# Altium PCB PCB.PcbDoc
Units mm, origin at the board's own origin, x right, y up, seen from the top; angles counter-clockwise.
Board outline 65 x 56 mm, 2 copper layers (Top Layer, Bottom Layer); 77 components, 98 nets, 362 pads, 32 vias.
Unrouted connection lines stored in the file: 125.
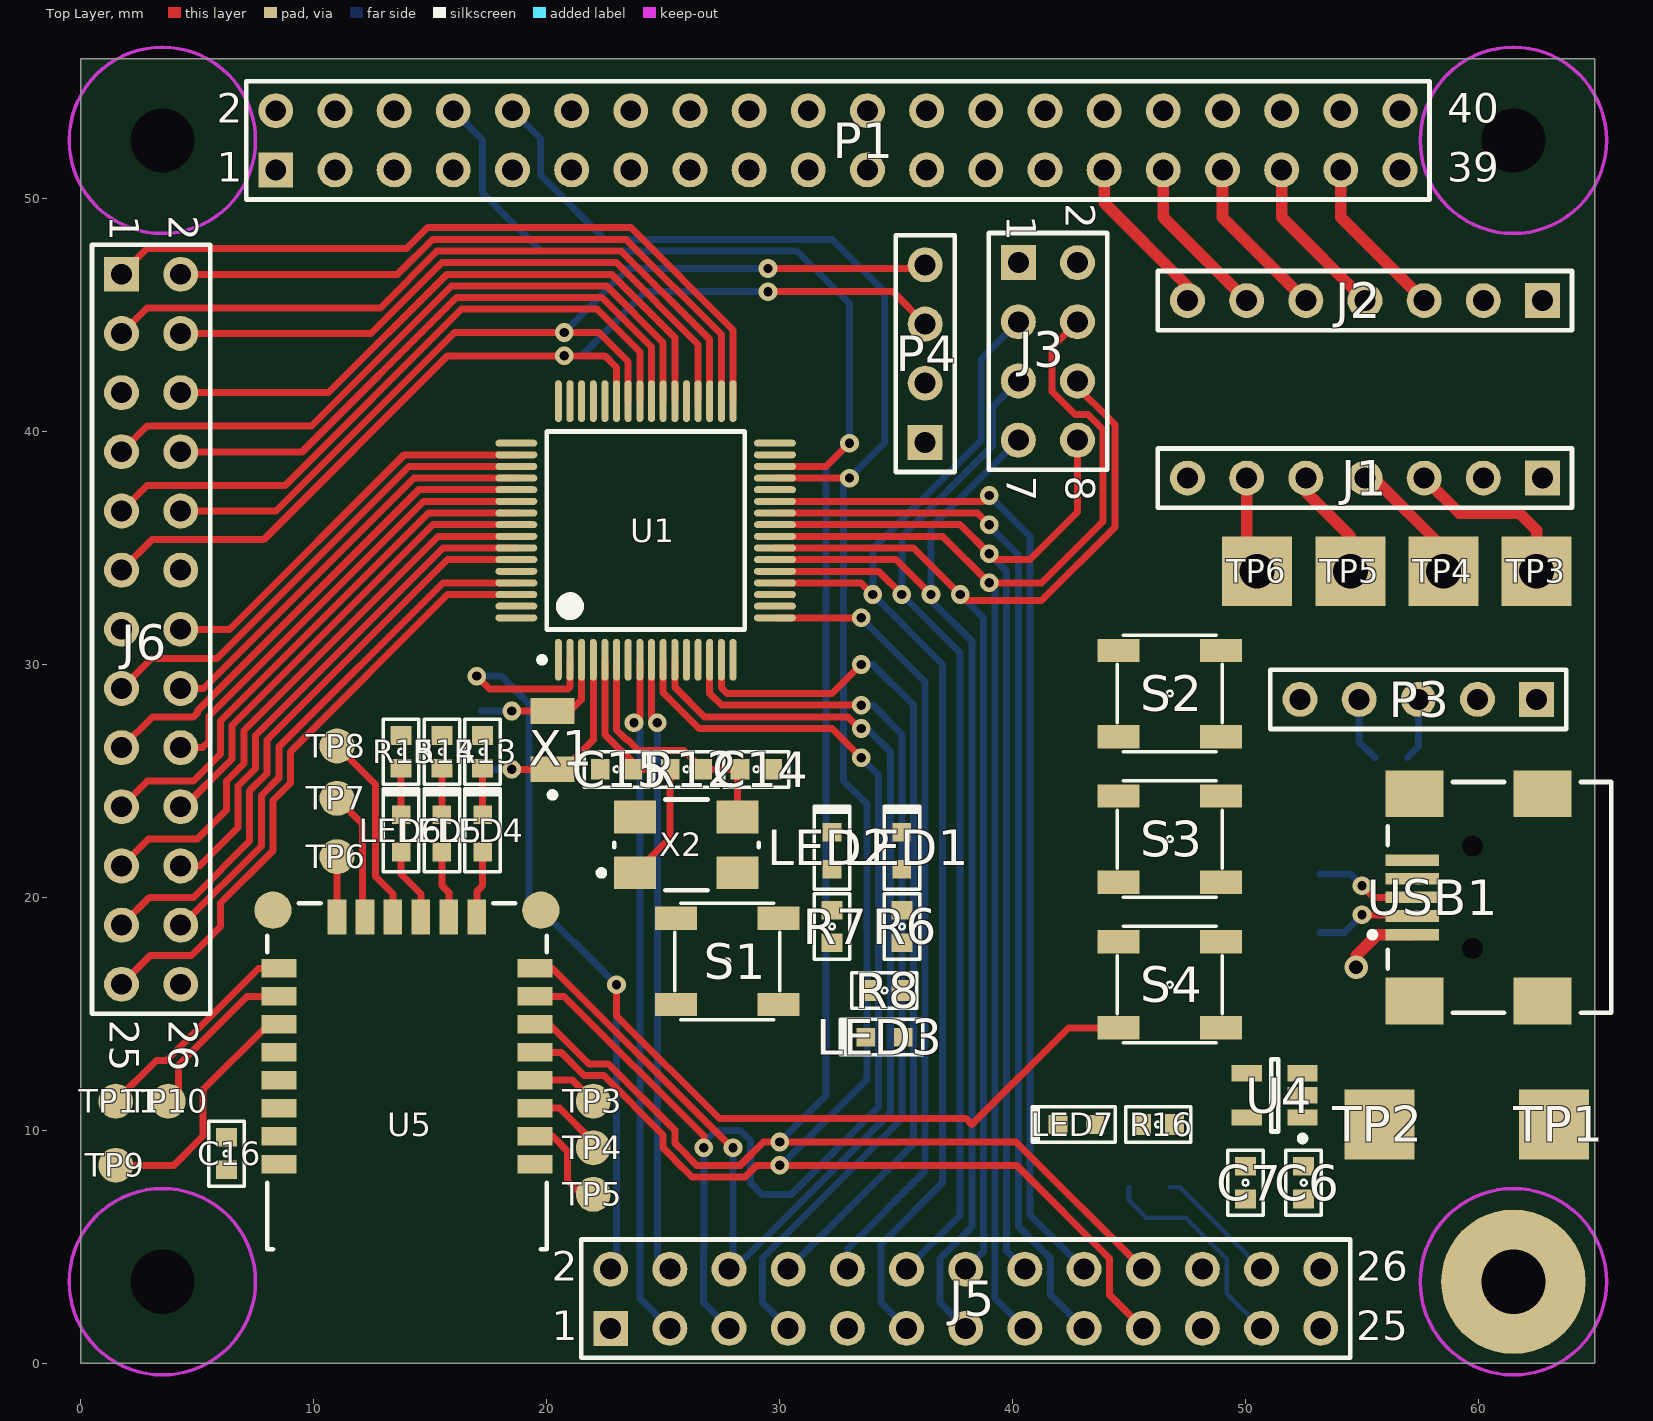
[diagram p0: Top Layer view]
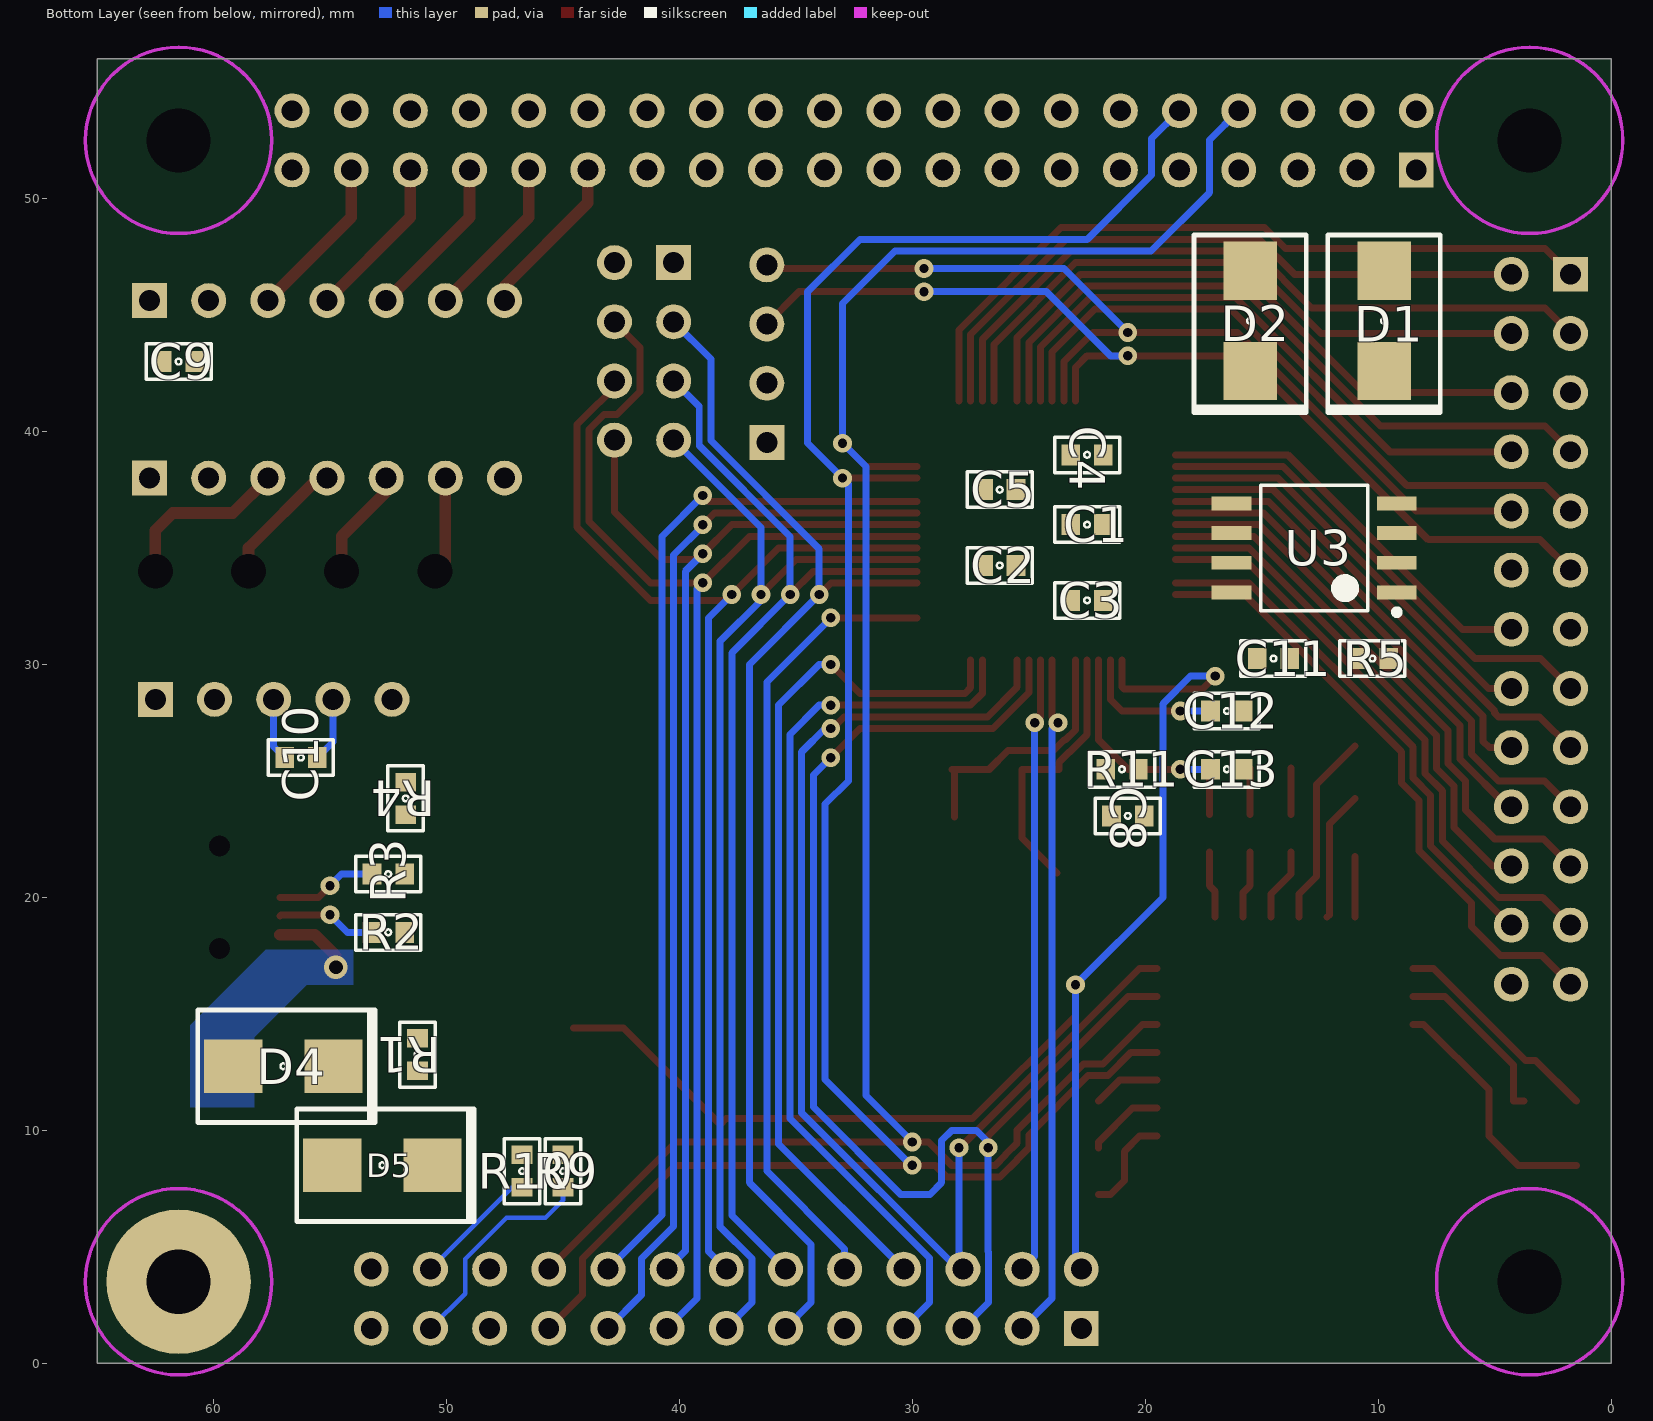
[diagram p1: Bottom Layer view, seen from below]

## Layer stack, top to bottom
Top Solder: solder mask 0.0102, Solder Resist, Dk 3.5
Top Layer: signal copper 0.0356
Dielectric1: dielectric 0.32, FR-4, Dk 4.8
Bottom Layer: signal copper 0.0356
Bottom Solder: solder mask 0.0102, Solder Resist, Dk 3.5

## Board outline
0,0 65,0 65,56 0,56

## Design rules (kind name [scope] priority, off if disabled: settings)
AssemblyTestPointUsage AssemblyTestPointUsage_1 [All] p2:
AssemblyTestpoint AssemblyTestpoint_1 [All] p2: testpointundercomponent=TRUE minsize=1.016 maxsize=2.54 preferedsize=1.524 minholesize=0 maxholesize=1.016 preferedholesize=0.813 testpointgrid=0.025 usegrid=TRUE gridtolerance=0 allowsidetop=TRUE allowsidebottom=TRUE
Clearance [All] p1: gap=0.2
FabricationTestPointUsage TestPointUsage [All] p2: valid=0 allowmultiple=FALSE
FabricationTestpoint Testpoint [All] p2: side=3 testpointundercomponent=TRUE minsize=1.016 maxsize=2.54 preferedsize=1.524 minholesize=0 maxholesize=1.016 preferedholesize=0.813 testpointgrid=0.025 allowsidetop=TRUE allowsidebottom=TRUE usegrid=TRUE gridtolerance=0
FanoutControl Fanout_LCC [IsLCC] p1: bgadir=Out bgaviamode=Centered fanoutstyle=Auto fanoutdirection=Alternating viagrid=0.025 // Fanout_LCC (Default Rule)
FanoutControl Fanout_BGA [IsBGA] p2: bgadir=Out bgaviamode=Centered fanoutstyle=Auto fanoutdirection=Alternating viagrid=0.025 // Fanout_BGA (Default Rule)
FanoutControl Fanout_Default [All] p4: bgadir=Out bgaviamode=Centered fanoutstyle=Auto fanoutdirection=Alternating viagrid=0.025 // Fanout_Default (Default Rule)
FanoutControl Fanout_Small [(CompPinCount < 5)] p5: bgadir=Out bgaviamode=Centered fanoutstyle=Auto fanoutdirection=OutThenIn viagrid=0.025 // Fanout_Small (Default Rule)
Height Height_1 [All] p2: minheight=0 maxheight=25.4 prefheight=12.7
HoleSize [All] p1: absolutevalues=TRUE maxlimit=0.6 minlimit=0.025 maxpercent=80.000 minpercent=20.000
MinimumSolderMaskSliver MinimumSolderMaskSliver_1 [All] p2 off: minsoldermaskwidth=0.254
NetAntennae NetAntennae_1 [All] p2 off: netantennaetolerance=0
PasteMaskExpansion [All] p1: expansion=-0.05
PlaneConnect [All] p1: planeconnectstyle=Direct reliefexpansion=0.508 reliefentries=4 reliefconductorwidth=0.254 reliefairgap=0.254
PolygonConnect [All] p1: connectstyle=Direct reliefconductorwidth=0.254 reliefentries=4 polygonreliefangle="90 Angle" airgapwidth=0.254
RoutingTopology [All] p1: topology=Horizontal
RoutingVias [All] p1: holewidth=0.6 width=1 viastyle="Through Hole" minholewidth=0.4 minwidth=0.8 maxholewidth=0.711 maxwidth=1.27
SilkToBoardRegionClearance SilkToBoardRegionClearance_1 [All] p2:
SilkToSilkClearance SilkToSilkClearance_1 [All] p2 off: silktosilkclearance=0.254
SilkToSolderMaskClearance SilkscreenOverComponentPads [IsPad] p2 off: minsilkscreentomaskgap=0.254 clearancetoexposedcopper=TRUE
SolderMaskExpansion [All] p1: expansion=0.1
Width [All] p1: maxlimit=1 minlimit=0.3 preferedwidth=0.5 minimp=50.000000 maximp=50.000000 favimp=50.000000
22 further rules are at their usual default settings.

## Components (designator, comment, footprint, x,y, rotation, side; value= is the part's Value field where it differs from the comment)
C1 "0.1uF" 1608[0603] 22.5,36 r180 bottom
C2 "0.1uF" 1608[0603] 26.25,34.25 r0 bottom
C3 "0.1uF" 1608[0603] 22.5,32.75 r180 bottom
C4 "0.1uF" 1608[0603] 22.5,39 r180 bottom
C5 "0.1uF" 1608[0603] 26.25,37.5 r0 bottom
C6 "1uF" 1608[0603] 52.5,7.75 r90 top
C7 "1uF" 1608[0603] 50,7.75 r90 top
C8 "0.1uF" 1608[0603] 20.75,23.5 r0 bottom
C9 "0.1uF" 1608[0603] 61.5,43 r0 bottom
C10 "1000pF" 1608[0603] 56.25,26 r0 bottom
C11 "0.1uF" 1608[0603] 14.5,30.25 r180 bottom
C12 "15pF" 1608[0603] 16.5,28 r180 bottom
C13 "15pF" 1608[0603] 16.5,25.5 r180 bottom
C14 "22pF" 1608[0603] 29,25.5 r0 top
C15 "22pF" 1608[0603] 23,25.5 r180 top
C16 "4.7uF" 1608[0603] 6.25,9 r270 top
D1 "B340LB-13-F" DIOM4336X25N 9.75,44.75 r270 bottom
D2 "B340LB-13-F" DIOM4336X25N 15.5,44.75 r270 bottom
D4 "B340LB-13-F" DIOM4336X25N 57,12.75 r180 bottom
D5 "B340LB-13-F" DIOM4336X25N 52.75,8.5 r180 bottom
J1 "Header 7" HDR1X7 62.75,38 r180 top
J2 "Header 7" HDR1X7 62.75,45.62 r180 top
J3 "NRF2401" HDR2X4 40.25,47.25 r270 top
J5 "HDR2X13" HDR2X13 22.75,1.5 r0 top
J6 "HDR2X13" HDR2X13 1.75,46.75 r270 top
LED1 "LED2" 0603_A 35.25,22 r270 top
LED2 "LED2" 0603_A 32.25,22 r270 top
LED3 "LED2" 0603_A 34.5,14 r0 top
LED4 "GREEN" 0603_A 17.25,22.75 r270 top
LED5 "RED" 0603_A 15.5,22.75 r270 top
LED6 "BLUE" 0603_A 13.75,22.75 r270 top
LED7 "GREEN" 0603_A 42.75,10.25 r0 top
P1 "RaspberryPi Header 20X2" HDR2X20 32.5,52.5 r0 top
P3 "Header 5" HDR1X5 62.5,28.5 r180 top
P4 "ISP DOWNLOAD PORT" HDR1X4 36.25,39.533 r90 top
R1 "0" 1608[0603] 51.25,13.25 r270 bottom
R2 "22" 1608[0603] 52.5,18.5 r0 bottom
R3 "22" 1608[0603] 52.5,21 r0 bottom
R4 "1.5k" 1608[0603] 51.75,24.25 r270 bottom
R5 "10k" 1608[0603] 10.25,30.25 r0 bottom
R6 "510" 1608[0603] 35.25,18.75 r270 top
R7 "510" 1608[0603] 32.25,18.75 r270 top
R8 "510" 1608[0603] 34.5,16 r0 top
R9 "10K" 1608[0603] 45,8.25 r270 bottom
R10 "10K" 1608[0603] 46.75,8.25 r270 bottom
R11 "10K" 1608[0603] 21,25.5 r0 bottom
R12 "1M" 1608[0603] 26,25.5 r0 top
R13 "330" 1608[0603] 17.25,26.25 r90 top
R14 "330" 1608[0603] 15.5,26.25 r90 top
R15 "330" 1608[0603] 13.75,26.25 r90 top
R16 "510" 1608[0603] 46.25,10.25 r0 top
S1 "TSKB-2JL" TSKB-2JL 27.75,17.25 r0 top
S2 "TSKB-2JL" TSKB-2JL 46.75,28.75 r0 top
S3 "TSKB-2JL" TSKB-2JL 46.75,22.5 r0 top
S4 "TSKB-2JL" TSKB-2JL 46.75,16.25 r0 top
TP1 "5V_BATT" PAD1#1 63.25,10.25 r90 top
TP2 "GND_BATT" PAD1#1 55.75,10.25 r90 top
TP3 "" PAD1#2 62.5,34 r0 top
TP3 "" PAD1#3 22,11.25 r0 top
TP4 "" PAD1#2 58.5,34 r0 top
TP4 "" PAD1#3 22,9.25 r0 top
TP5 "" PAD1#2 54.5,34 r0 top
TP5 "" PAD1#3 22,7.25 r0 top
TP6 "" PAD1#3 11,21.75 r0 top
TP6 "" PAD1#2 50.5,34 r0 top
TP7 "" PAD1#3 11,24.25 r0 top
TP8 "" PAD1#3 11,26.5 r0 top
TP9 "" PAD1#3 1.5,8.5 r0 top
TP10 "" PAD1#3 3.75,11.25 r90 top
TP11 "" PAD1#3 1.5,11.25 r90 top
U1 "STM32F103RCT6TR" STM-LQFP64_N 24.25,35.75 r90 top
U3 "W25X16" SOIC-SSCODE_SOIC127P790X216-8N 12.75,35 r0 bottom
U4 "MCP1801T-3302I/OT" SOT-23-OT5_M 51.25,11.5 r180 top
U5 "RN4020 MODULE-24" "RN4020 MODULE-24" 14,14 r180 top
USB1 "USB002" USB/SM0.8-6H5 65,20 r0 top
X1 "ABS07-32.768KHz-T" ABRA-ABS07-2_V 20.25,26.75 r90 top
X2 "ABMM2-8.000MHZ-E2-T" ABRA-ABMM2-4_V 26,22.25 r0 top

## Footprints (in the part's own frame and the unit in brackets; to place one, negate y for a bottom-side part, rotate by r counter-clockwise, add the part's x,y. Pads: shape width x height; smd on the part's side, far side on the other; paste and mask are expansions set on the pad)
0603_A [mm] "Chip LED, 1608"
  rect 0.8x0.8 smd: 1(-0.8,0) 2(0.8,0)
  silkscreen extent -1.91,-0.76 1.65,0.76, body extent -0.8,-0.4 0.8,0.4, height 0.7
1608[0603] [mm] "Chip Capacitor, Body 1.6x0.8mm, IPC High Density"
  rect 0.8x0.9 smd: 1(-0.7,0) 2(0.7,0)
  silkscreen extent -1.4,-0.76 1.4,0.76, body extent -0.87,-0.48 0.87,0.48, height 1.3
ABRA-ABMM2-4_V [mm] "SMD, 4-Leads, Body 6.2x3.9mm, Pitch 4.4mm, Height 1.2mm"
  rect 1.8x1.4 smd: 1(-2.2,-1.2) 2(2.2,-1.2) 3(2.2,1.2) 4(-2.2,1.2)
  silkscreen extent -3.77,-1.95 3.1,1.95, body extent -3.1,-1.95 3.1,1.95, height 1.2
ABRA-ABS07-2_V [mm] "Hand Drawn, 2-Leads, Body 3.2x1.5mm, Pitch 2.5mm"
  rect 1.1x1.9 smd: 1(-1.25,0) 2(1.25,0)
  silkscreen extent -2.47,-0.13 -2.23,0.12, body extent -1.6,-0.75 1.6,0.75, height 0.9
DIOM4336X25N [mm] "Molded Diode, 2-Leads, Body 4.31x3.62mm, IPC Medium Density"
  rect 2.5x2.3 smd: 1(-2.15,0) 2(2.15,0)
  silkscreen extent -3.68,-2.41 3.94,2.41, body extent -2.5,-1.97 2.51,1.97, height 2.5
HDR1X4 [mm] "Connector; Header; 4 Position"
  rect 1.5x1.5 hole 0.9: 1(0,0)
  round 1.5 hole 0.9: 2(2.54,0) 3(5.08,0) 4(7.62,0)
  silkscreen extent -1.27,-1.27 8.89,1.27
HDR1X5 [mm] "Connector; Header; 5 Position"
  rect 1.5x1.5 hole 0.9: 1(0,0)
  round 1.5 hole 0.9: 2(2.54,0) 3(5.08,0) 4(7.62,0) 5(10.16,0)
  silkscreen extent -1.27,-1.27 11.43,1.27
HDR1X7 [mm] "Connector; Header; 7 Position"
  rect 1.5x1.5 hole 0.9: 1(0,0)
  round 1.5 hole 0.9: 2(2.54,0) 3(5.08,0) 4(7.62,0) 5(10.16,0) 6(12.7,0) 7(15.24,0)
  silkscreen extent -1.27,-1.27 16.51,1.27
HDR2X4 [mm] "Connector; Header; 4x2 Position"
  rect 1.5x1.5 hole 0.9: 1(0,0)
  round 1.5 hole 0.9: 2(0,2.54) 3(2.54,0) 4(2.54,2.54) 5(5.08,0) 6(5.08,2.54) 7(7.62,0) 8(7.62,2.54)
  silkscreen extent -1.27,-1.27 8.89,3.81
HDR2X13 [mm] "Connector; Header; 13x2 Position"
  rect 1.5x1.5 hole 0.9: 1(0,0)
  round 1.5 hole 0.9: 2(0,2.54) 3(2.54,0) 4(2.54,2.54) 5(5.08,0) 6(5.08,2.54) 7(7.62,0) 8(7.62,2.54) 9(10.16,0) 10(10.16,2.54) 11(12.7,0) 12(12.7,2.54) 13(15.24,0) 14(15.24,2.54) 15(17.78,0) 16(17.78,2.54) 17(20.32,0) 18(20.32,2.54) 19(22.86,0) 20(22.86,2.54) 21(25.4,0) 22(25.4,2.54) 23(27.94,0) 24(27.94,2.54) 25(30.48,0) 26(30.48,2.54)
  silkscreen extent -1.27,-1.27 31.75,3.81
HDR2X20 [mm] "Connector; Header; 20x2 Position"
  rect 1.5x1.5 hole 0.9: 1(-24.13,-1.27)
  round 1.5 hole 0.9: 2(-24.13,1.27) 3(-21.59,-1.27) 4(-21.59,1.27) 5(-19.05,-1.27) 6(-19.05,1.27) 7(-16.51,-1.27) 8(-16.51,1.27) 9(-13.97,-1.27) 10(-13.97,1.27) 11(-11.43,-1.27) 12(-11.43,1.27) 13(-8.89,-1.27) 14(-8.89,1.27) 15(-6.35,-1.27) 16(-6.35,1.27) 17(-3.81,-1.27) 18(-3.81,1.27) 19(-1.27,-1.27) 20(-1.27,1.27) 21(1.27,-1.27) 22(1.27,1.27) 23(3.81,-1.27) 24(3.81,1.27) 25(6.35,-1.27) 26(6.35,1.27) 27(8.89,-1.27) 28(8.89,1.27) 29(11.43,-1.27) 30(11.43,1.27) 31(13.97,-1.27) 32(13.97,1.27) 33(16.51,-1.27) 34(16.51,1.27) 35(19.05,-1.27) 36(19.05,1.27) 37(21.59,-1.27) 38(21.59,1.27) 39(24.13,-1.27) 40(24.13,1.27)
  silkscreen extent -25.4,-2.54 25.4,2.54
PAD1#1 [mm]
  rect 3x3 smd: 1(0,0)
PAD1#2 [mm]
  rect 3x3 / inner rect 3x3 / far side rect 0x0 hole 1.5: 1(0,0)
PAD1#3 [mm]
  round 1.5 smd: 1(0,0)
"RN4020 MODULE-24" [mm]
  rect 1.5x0.8 smd: 1(-5.5,5.45) 2(-5.5,4.25) 3(-5.5,3.05) 4(-5.5,1.85) 5(-5.5,0.65) 6(-5.5,-0.55) 7(-5.5,-1.75) 8(-5.5,-2.95) 17(5.5,-2.95) 18(5.5,-1.75) 19(5.5,-0.55) 20(5.5,0.65) 21(5.5,1.85) 22(5.5,3.05) 23(5.5,4.25) 24(5.5,5.45)
  round 1.6 smd: 9(-5.75,-5.45) 16(5.75,-5.45)
  rect 0.8x1.5 smd: 10(-3,-5.15) 11(-1.8,-5.15) 12(-0.6,-5.15) 13(0.6,-5.15) 14(1.8,-5.15) 15(3,-5.15)
  silkscreen extent -6,-5.75 6,9.1, body extent -5.75,-5.45 5.75,14.05, height 2.3
SOIC-SSCODE_SOIC127P790X216-8N [mm] "SOIC, 8-Leads, Body 5.28x5.28mm, Pitch 1.27mm, IPC Medium Density"
  rect 1.7x0.6 smd: 1(-3.55,1.905) 2(-3.55,0.635) 3(-3.55,-0.635) 4(-3.55,-1.905) 5(3.55,-1.905) 6(3.55,-0.635) 7(3.55,0.635) 8(3.55,1.905)
  silkscreen extent -3.67,-2.7 2.3,2.88, body extent -3.95,-2.7 3.95,2.7, height 2.16
SOT-23-OT5_M [mm] "SOT23, 5-Leads, Body 2.9x1.7mm, Pitch 0.95mm, Lead Span 2.8mm, IPC Low Density"
  rect 1.3x0.7 smd: 1(-1.2,0.95) 2(-1.2,0) 3(-1.2,-0.95) 4(1.2,-0.95) 5(1.2,0.95)
  silkscreen extent -1.33,-1.55 0.15,1.97, body extent -0.9,-1.55 0.9,1.55, height 1.45
STM-LQFP64_N [mm] "Thin QFP, 64-Leads, Body 10x10mm, Pitch 0.5mm, IPC Medium Density"
  oval 1.8x0.3 smd: 1(-5.55,3.75) 2(-5.55,3.25) 3(-5.55,2.75) 4(-5.55,2.25) 5(-5.55,1.75) 6(-5.55,1.25) 7(-5.55,0.75) 8(-5.55,0.25) 9(-5.55,-0.25) 10(-5.55,-0.75) 11(-5.55,-1.25) 12(-5.55,-1.75) 13(-5.55,-2.25) 14(-5.55,-2.75) 15(-5.55,-3.25) 16(-5.55,-3.75) 33(5.55,-3.75) 34(5.55,-3.25) 35(5.55,-2.75) 36(5.55,-2.25) 37(5.55,-1.75) 38(5.55,-1.25) 39(5.55,-0.75) 40(5.55,-0.25) 41(5.55,0.25) 42(5.55,0.75) 43(5.55,1.25) 44(5.55,1.75) 45(5.55,2.25) 46(5.55,2.75) 47(5.55,3.25) 48(5.55,3.75)
  oval 0.3x1.8 smd: 17(-3.75,-5.55) 18(-3.25,-5.55) 19(-2.75,-5.55) 20(-2.25,-5.55) 21(-1.75,-5.55) 22(-1.25,-5.55) 23(-0.75,-5.55) 24(-0.25,-5.55) 25(0.25,-5.55) 26(0.75,-5.55) 27(1.25,-5.55) 28(1.75,-5.55) 29(2.25,-5.55) 30(2.75,-5.55) 31(3.25,-5.55) 32(3.75,-5.55) 49(3.75,5.55) 50(3.25,5.55) 51(2.75,5.55) 52(2.25,5.55) 53(1.75,5.55) 54(1.25,5.55) 55(0.75,5.55) 56(0.25,5.55) 57(-0.25,5.55) 58(-0.75,5.55) 59(-1.25,5.55) 60(-1.75,5.55) 61(-2.25,5.55) 62(-2.75,5.55) 63(-3.25,5.55) 64(-3.75,5.55)
  silkscreen extent -5.67,-4.25 4.25,4.57, body extent -5,-5 5,5, height 1.6
TSKB-2JL [mm] "tact switch"
  rect 1.8x1 smd: 1(-2.2,1.85) 2(-2.2,-1.85) 3(2.2,1.85) 4(2.2,-1.85)
  silkscreen extent -2.25,-2.5 2.25,2.5
USB/SM0.8-6H5 [mm] "Connector; USB2.0, Type B, SM; 5 Position; Right Angle"
  rect 2.3x0.5 smd: 1(-7.85,-1.6) 2(-7.85,-0.8) 3(-7.85,0) 4(-7.85,0.8) 5(-7.85,1.6)
  rect 2.5x2 smd: 6(-7.75,4.45) 7(-2.25,4.45) 8(-7.75,-4.45) 9(-2.25,-4.45)
  round 0.6 hole 0.9 unplated: MH1(-5.25,2.2) MH2(-5.25,-2.2)
  silkscreen extent -9.67,-4.95 0.7,4.95, body extent -8.9,-4.95 0.7,4.95, height 3.9

## Part data
C1 C2 C3 C4 C5 C6 C7 C8 C9 C10 C11 C12 C13 C14 C15 C16: library part Cap, "Capacitor"
D1 D2 D4 D5: library part "D Schottky", "Schottky Diode"
J1 J2: "Header, 7-Pin"
J3: library part "Header 4X2", "Header, 4-Pin, Dual row"
J5 J6: library part MHDR2X13, "Header, 13-Pin, Dual row"
LED1 LED2 LED3: "Typical RED, GREEN, YELLOW, AMBER GaAs LED"
LED4 LED5 LED6 LED7: library part LED2, "Typical RED, GREEN, YELLOW, AMBER GaAs LED"
P1: library part "Header 20X2", "Header, 20-Pin, Dual row"
P3: "Header, 5-Pin"
P4: library part "Header 4", "Header, 4-Pin"
R1 R2 R3 R4 R5 R6 R7 R8 R9 R10 R11 R12 R13 R14 R15 R16: library part Res1, "Resistor"
S1 S2 S3 S4: library part SW-PB, "Switch"
TP1 TP2 TP3 TP3 TP4 TP4 TP5 TP5 TP6 TP6 TP7 TP8 TP9 TP10 TP11: library part RAUND1
U1: library part CMP-0237-00202-3, "ARM Cortex-M3 32-bit MCU, 256 KB Flash, 48 KB Internal RAM, 51 I/Os, 64-pin LQFP, -40 to 85 degC, Tape and Reel"
U4: library part CMP-0136-00719-1, "150 mA, High PSRR, Low Quiescent Current LDO, 5-Pin SOT-23, Industrial Temperature, Tape and Reel"
X1: library part CMP-0447-00001-2, "Crystal, 32.768 kHz, 12.5 pF, -40 to 85 degC, SMD Low Profile 3.2 x 1.5 x 0.9 mm, Tape and Reel"
X2: library part CMP-0277-00003-1, "Ceramic Surface Mount Low Profile Quartz Crystal, 8 MHz, -20 to 70 degC, 4-Pin 6 x 3.6 x 1.2 mm SMD, RoHS, 1000pcs / Reel"

## Free pads (board coordinates)
  round 0 hole 2.75: ""(3.5,3.5) ""(3.5,52.5) ""(61.5,52.5)
  round 6.2 hole 2.75: ""(61.5,3.5)

## Via types
v1: diameter 0.8, hole 0.4, Top Layer to Bottom Layer, 31 vias
v2: diameter 1, hole 0.6, Top Layer to Bottom Layer, 1 vias

## Nets (pads, with @x,y where several pads share a name; then routed paths per layer and width w, separated by ;. In a path a pad name is that pad's centre, name@x,y a point inside that pad or via, vN(x,y) a via of type N, cw(c..) or ccw(c..) an arc to the next point about the centre after c; other vN are vias at no path point)
3V3: C1.2 C2.2 C3.2 C4.2 C5.2 C7.2 C9.1 C11.2 C16.1 D2.2 J2.2 J3.2 J5.9 J5.21 J5.22 P3.1 R4.1 R5.2 R6.2 R7.2 R8.2 R11.1 S2.1 U1.1 U1.13 U1.16 U1.19 U1.32 U1.48 U1.64 U3.3 U3.7 U3.8 U4.5 U5.23
5V: C6.2 D1.2 J1.2 P4.1 R1.1 R16.2 U4.1 U4.3
5V_BATT: D5.1 TP1.1
A0: J6.6 U1.38 | length 27.2
  Top Layer w0.3: J6.6 10.634,41.67 15.714,46.75 22.786,46.75 25.5,44.036 25.5,43.293 U1.38
AENBL: J2.5 P1.33 | length 7.1
  Top Layer w0.5: P1.33 49.01,49.2 J2.5
APHASE: J2.6 P1.31 | length 7.1
  Top Layer w0.5: P1.31 46.47,49.2 J2.6
ARM_HORIZ: P1.15
ARM_VERT: P1.13
BENBL: J2.3 P1.37 | length 7.1
  Top Layer w0.5: P1.37 54.09,49.2 J2.3
BOOT0: R9.1 U1.60
BOOT1: R10.1 U1.28
BPHASE: J2.4 P1.35 | length 7.1
  Top Layer w0.5: P1.35 51.55,49.2 J2.4
CMD: J5.6 U1.11 U5.8 | length 53.7
  Top Layer w0.3: U5.8 20.257,16.95 27.957,9.25 v1(28,9.25) ; U1.11 25.5,29.026 26.776,27.75 32.939,27.75 33.439,27.25 v1(33.5,27.25)
  Bottom Layer w0.3: v1(28,9.25) 28,4.21 J5.6 28.04,4.04 34.75,10.75 34.75,26.25 33.75,27.25 v1(33.5,27.25)
CS: J6.1 U1.33 | length 32
  Top Layer w0.3: J6.1 2.85,47.85 13.986,47.85 14.886,48.75 23.614,48.75 28,44.364 28,43.621 U1.33
GND: C1.1 C2.1 C3.1 C4.1 C5.1 C6.1 C7.1 C8.1 C9.2 C11.1 C12.2 C13.2 C14.2 C15.2 C16.2 J1.1 J2.1 J3.1 J5.1 J5.25 J5.26 J6.26 LED3.1 LED7.1 P1.6 P1.9 P1.14 P1.20 P1.25 P1.30 P1.34 P1.39 P3.5 P4.2 R13.2 R14.2 R15.2 S1.2 S3.1 S4.1 TP2.1 U1.12 U1.18 U1.31 U1.47 U1.63 U3.4 U4.2 U5.1 U5.9 U5.16 U5.24 USB1.4 USB1.5 X2.2 X2.4
KEY0: J5.4 S3.2 U1.9 | length 26.5
  Top Layer w0.3: U1.9 24.5,27.75 v1(24.75,27.5)
  Bottom Layer w0.3: v1(24.75,27.5) 24.75,4.58 J5.4
KEY1: J5.2 S4.2 U1.2 | length 60.6
  Top Layer w0.3: v1(17,29.5) 17.55,28.95 20.924,28.95 21,29.026 U1.2 ; v1(23,16.25) 23,14.914 27.414,10.5 38,10.5 38.25,10.25 42.4,14.4 S4.2
  Bottom Layer w0.3: v1(17,29.5) 18.061,29.5 19.25,28.311 19.25,20 v1(23,16.25) 23,4.29 J5.2
LED0: J6.9 LED1.1 U1.41 | length 28.7
  Top Layer w0.3: J6.9 2.85,37.69 8.776,37.69 16.336,45.25 22.164,45.25 24,43.414 24,42.671 U1.41
LED1: J6.18 LED2.1 U1.54 | length 19.4
  Top Layer w0.3: J6.18 5.23,26.43 5.5,26.7 5.5,27.786 14.714,37 16.139,37 U1.54
MODE: J2.7 P1.29 | length 7.1
  Top Layer w0.5: P1.29 43.93,49.82 47.51,46.24 J2.7
NetC10_2: C10.2 P3.3 | length 2.7
  Bottom Layer w0.3: C10.2 57.42,26.47 P3.3
NetD1_1: D1.1 P1.2 P1.4
NetD2_1: D2.1 P1.1 P1.17
NetD4_1: D4.1 USB1.1 | length 3.3
  Top Layer w0.5: v2(54.75,17) 54.75,17.5 55.65,18.4 USB1.1
NetD4_2: D4.2 D5.2 R1.2
NetJ1_3: J1.3 TP3.1@62.5,34 | length 7.5
  Top Layer w0.5: J1.3 59.17,36.5 61.75,36.5 62.5,35.75 TP3.1@62.5,34
NetJ1_4: J1.4 TP4.1@58.5,34 | length 5.6
  Top Layer w0.5: J1.4 55.5,38 58.5,35 TP4.1@58.5,34
NetJ1_5: J1.5 TP5.1@54.5,34 | length 4.8
  Top Layer w0.5: J1.5 52.59,37.41 54.5,35.5 TP5.1@54.5,34
NetJ1_6: J1.6 TP6.1@50.5,34 | length 4.2
  Top Layer w0.5: J1.6 50.05,34.45 TP6.1@50.5,34
NetJ5_23: J5.23 R9.2 | length 9.4
  Bottom Layer w0.2: R9.2 45,7 45.75,6.25 47.425,6.25 49.2,4.475 49.2,2.99 J5.23
NetJ5_24: J5.24 R10.2 | length 5.4
  Bottom Layer w0.2: R10.2 47.18,7.55 J5.24
NetLED1_2: LED1.2 R6.1
NetLED2_2: LED2.2 R7.1
NetLED3_2: LED3.2 R8.1
NetLED4_1: LED4.1 R13.1 | length 2
  Top Layer w0.3: LED4.1 R13.1
NetLED4_2: LED4.2 U5.10 | length 2.9
  Top Layer w0.3: U5.10 17,20.25 17.25,20.5 LED4.2
NetLED5_1: LED5.1 R14.1 | length 2
  Top Layer w0.3: LED5.1 R14.1
NetLED5_2: LED5.2 U5.11 | length 2.9
  Top Layer w0.3: LED5.2 15.5,20.5 15.8,20.2 U5.11
NetLED6_1: LED6.1 R15.1 | length 2
  Top Layer w0.3: LED6.1 R15.1
NetLED6_2: LED6.2 U5.12 | length 3.2
  Top Layer w0.3: LED6.2 13.75,21 14.6,20.15 U5.12
NetR2_2: R2.2 USB1.2 | length 4.3
  Top Layer w0.3: v1(55,19.25) 57.1,19.25 USB1.2
  Bottom Layer w0.3: R2.2 54.25,18.5 v1(55,19.25)
NetR3_2: R3.2 R4.2 USB1.3 | length 4.4
  Top Layer w0.3: v1(55,20.5) 55.5,20 USB1.3
  Bottom Layer w0.3: R3.2 54.5,21 v1(55,20.5)
NetR5_1: R5.1 U3.1
NetTP3_1: TP3.1@22,11.25 U5.4 | length 2.9
  Top Layer w0.3: U5.4 21.1,12.15 TP3.1@22,11.25
NetTP4_1: TP4.1@22,9.25 U5.3 | length 3.4
  Top Layer w0.3: U5.3 20.55,10.95 22,9.5 TP4.1@22,9.25
NetTP5_1: TP5.1@22,7.25 U5.2 | length 4.3
  Top Layer w0.3: U5.2 20.25,9.75 20.9,9.1 20.9,7.85 21.5,7.25 TP5.1@22,7.25
NetTP6_1: TP6.1@11,21.75 U5.15 | length 2.6
  Top Layer w0.3: U5.15 TP6.1@11,21.75
NetTP7_1: TP7.1 U5.14 | length 5.6
  Top Layer w0.3: TP7.1 12.1,23.15 12.1,19.25 U5.14
NetTP8_1: TP8.1 U5.13 | length 8.3
  Top Layer w0.3: TP8.1 12.65,24.85 12.65,20.898 13.4,20.148 U5.13
NetTP9_1: TP9.1 U5.19 | length 10.7
  Top Layer w0.3: TP9.1 4,8.5 5.25,9.75 5.25,11.745 8.055,14.55 U5.19
NetTP10_1: TP10.1 U5.18 | length 7.5
  Top Layer w0.3: TP10.1 4.2,11.25 4.2,12.812 7.138,15.75 U5.18
NetTP11_1: TP11.1 U5.17 | length 9.4
  Top Layer w0.3: TP11.1 3.25,13 3.681,13 7.631,16.95 U5.17
NRF_CE: J3.3 J5.11 U1.20 | length 53
  Top Layer w0.3: U1.20 33.5,33.5 v1(34,33)
  Bottom Layer w0.3: J5.11 34.35,2.6 34.35,5.1 37,7.75 37,30 v1(34,33) 34,34.957 38.65,39.607 38.65,43.11 J3.3
NRF_CS: J3.4 J5.15 U1.24 | length 58.9
  Top Layer w0.3: U1.24 37,35.5 v1(39,33.5) 41.25,33.5 43.89,36.14 43.89,40.086 43.246,40.73 42.674,40.73 41.69,41.714 41.69,43.61 J3.4
  Bottom Layer w0.3: v1(39,33.5) 39.25,33.25 39.25,2.78 J5.15
NRF_IRQ: J3.8 J5.16 U1.25 | length 48.9
  Top Layer w0.3: U1.25 37.75,36 v1(39,34.75) 39.25,34.5 40.75,34.5 42.79,36.54 J3.8
  Bottom Layer w0.3: v1(39,34.75) 39.75,34 39.75,4.82 J5.16
OSC_IN1: C12.1 U1.3 X1.2 | length 6.2
  Top Layer w0.3: v1(18.5,28) X1.2 21,28 21.5,28.5 U1.3
  Bottom Layer w0.3: C12.1 v1(18.5,28)
OSC_IN2: C15.1 R12.1 U1.5 X2.1 | length 11.9
  Top Layer w0.3: U1.5 22.5,26.982 23.232,26.25 23.25,26.25 23.7,25.8 C15.1 R12.1 25.3,22.55 X2.1
OSC_OUT1: C13.1 U1.4 X1.1 | length 8.8
  Top Layer w0.3: v1(18.5,25.5) X1.1 20.75,25.5 22,26.75 U1.4
  Bottom Layer w0.3: C13.1 v1(18.5,25.5)
OSC_OUT2: C14.1 R12.2 U1.6 X2.3 | length 11.1
  Top Layer w0.3: U1.6 23,27.189 23.439,26.75 23.5,26.75 23.95,26.3 25.9,26.3 R12.2 C14.1 28.2,25.4 X2.3
PA0: J5.7 S2.2 U1.14 | length 38.9
  Top Layer w0.3: U1.14 27,28.75 27.5,28.25 v1(33.5,28.25)
  Bottom Layer w0.3: J5.7 29.27,2.6 29.27,4.52 35.25,10.5 35.25,27 34,28.25 v1(33.5,28.25)
PA1: J5.8 U1.15 | length 37.2
  Top Layer w0.3: U1.15 27.5,29 27.75,28.75 32.25,28.75 v1(33.5,30)
  Bottom Layer w0.3: J5.8 35.75,9.42 35.75,28.25 34,30 v1(33.5,30)
PA3: J5.10 U1.17 | length 34.2
  Top Layer w0.3: U1.17 v1(33.5,32)
  Bottom Layer w0.3: J5.10 32.91,4.91 36.25,8.25 36.25,29.25 v1(33.5,32)
PA5: J3.5 J5.12 U1.21 U3.6 | length 48.1
  Top Layer w0.3: U1.21 34.25,34 v1(35.25,33)
  Bottom Layer w0.3: J5.12 37.75,6.34 37.75,30.5 v1(35.25,33) 35.25,35.5 39.15,39.4 39.15,41.07 J3.5
PA6: J3.7 J5.13 U1.22 U3.2 | length 48.7
  Top Layer w0.3: U1.22 35,34.5 v1(36.5,33)
  Bottom Layer w0.3: J5.13 36.89,2.6 36.89,4.496 38.25,5.856 38.25,31 36.5,32.75 v1(36.5,33) 36.5,35.88 J3.7
PA7: J3.6 J5.14 U1.23 U3.5 | length 53.8
  Top Layer w0.3: U1.23 35.75,35 v1(37.75,33) 38,32.75 41.25,32.75 44.39,35.89 44.39,40.293 42.513,42.17 J3.6
  Bottom Layer w0.3: v1(37.75,33) 38.75,32 38.75,4.8 J5.14
PA9: J6.10 P4.4 U1.42 | length 41.2
  Top Layer w0.3: J6.10 8.383,36.59 16.043,44.25 v1(20.75,44.25) 22.25,44.25 23.5,43 23.5,42.464 U1.42 ; v1(29.5,47) P4.4@36.25,47
  Bottom Layer w0.3: v1(20.75,44.25) 23.5,47 v1(29.5,47)
PA10: J6.11 P4.3 U1.43 | length 43.9
  Top Layer w0.3: J6.11 3.054,35.354 7.854,35.354 15.75,43.25 v1(20.75,43.25) 22.5,43.25 23,42.75 U1.43 ; v1(29.5,46) 34.863,46 P4.3
  Bottom Layer w0.3: v1(20.75,43.25) 21.5,43.25 24.25,46 v1(29.5,46)
PA11: R2.1 U1.44
PA12: R3.1 U1.45
PA13: J6.12
PA14: J6.13
PA15: J6.14 U1.50 | length 17.5
  Top Layer w0.2: J6.14 J6.14@4.3,31.5
  Top Layer w0.3: J6.14@4.3,31.5 6.386,31.5 13.886,39 15.25,39 U1.50
PB0: J5.17 U1.26 | length 45.6
  Top Layer w0.3: U1.26 38.5,36.5 v1(39,36)
  Bottom Layer w0.3: v1(39,36) 39,35.94 40.25,34.69 40.25,5.876 41.63,4.496 41.63,2.94 J5.17
PB1: J5.18 U1.27 | length 44.2
  Top Layer w0.3: U1.27 38.75,37 v1(39,37.25)
  Bottom Layer w0.3: v1(39,37.25) 40.75,35.5 40.75,6.36 J5.18
PB3: J6.19 U1.55 | length 23
  Top Layer w0.3: J6.19 2.86,25 4.846,25 6,26.154 6,27.578 14.922,36.5 16.346,36.5 U1.55
PB4: J6.20 U1.56 | length 20.3
  Top Layer w0.2: J6.20 J6.20@4.443,23.89
  Top Layer w0.3: J6.20@4.443,23.89 6.5,25.947 6.5,27.371 15.129,36 16.553,36 U1.56
PB5: J6.21 U1.57 | length 24.4
  Top Layer w0.3: J6.21 2.9,22.5 5,22.5 6.25,23.75 6.25,24.99 7,25.74 7,27.164 15.336,35.5 16.76,35.5 U1.57
PB6: J6.22 U1.58 | length 21.9
  Top Layer w0.3: J6.22 5.1,21.35 6.75,23 6.75,24.783 7.5,25.533 7.5,26.957 15.543,35 16.967,35 U1.58
PB7: J6.23 U1.59 | length 25.5
  Top Layer w0.3: J6.23 2.94,20 4.836,20 7.25,22.414 7.25,24.576 8,25.326 8,26.75 15.75,34.5 U1.59
PB8: J6.24 U1.61 | length 22.5
  Top Layer w0.3: J6.24 4.353,18.81 7.75,22.207 7.75,24.369 8.5,25.119 8.5,26.457 15.543,33.5 17.25,33.5 U1.61
PB9: J6.25 U1.62 | length 26.5
  Top Layer w0.3: J6.25 2.98,17.5 4.75,17.5 6,18.75 6,19.75 8.25,22 8.25,24.162 9,24.912 9,26.25 15.75,33 U1.62
PB10: J5.19 P1.10 U1.29 U5.5 | length 96.2
  Top Layer w0.3: U5.5 20.607,13.35 21.607,12.35 22.456,12.35 25,9.806 25,9.25 25.5,8.75 25.5,8.732 26.232,8 28.518,8 29.018,8.5 v1(30,8.5) 40.166,8.5 44.17,4.496 44.17,2.94 J5.19 ; U1.29 v1(33,38)
  Bottom Layer w0.3: P1.10 19.73,52.57 19.73,51.014 22.494,48.25 32.25,48.25 34.5,46 34.5,39.5 v1(33,38) 32.75,37.75 32.75,29.689 32.75,26.939 32.75,25 33.75,24 33.75,12.189 30.061,8.5 v1(30,8.5)
PB11: J5.20 P1.8 U1.30 U5.6 | length 94.2
  Top Layer w0.3: U5.6 20.114,14.55 21.814,12.85 22.663,12.85 25.5,10.013 25.5,9.457 26,8.957 26,8.939 26.439,8.5 28.311,8.5 29.311,9.5 v1(30,9.5) 40.15,9.5 J5.20 ; U1.30 32,38.5 v1(33,39.5)
  Bottom Layer w0.3: P1.8 17.25,52.51 17.25,50.25 19.75,47.75 30.75,47.75 33,45.5 v1(33,39.5) 32,38.5 32,11.5 v1(30,9.5)
PB13: J6.2 U1.34 | length 28.4
  Top Layer w0.3: J6.2 13.593,46.75 15.093,48.25 23.407,48.25 27.5,44.157 U1.34
PB14: J6.3 U1.35 | length 30.9
  Top Layer w0.3: J6.3 2.85,45.31 12.86,45.31 15.3,47.75 23.2,47.75 27,43.95 U1.35
PB15: J6.4 U1.36 | length 27.4
  Top Layer w0.3: J6.4 12.467,44.21 15.507,47.25 22.993,47.25 26.5,43.743 U1.36
PC0: J5.3 U1.8 | length 29.4
  Top Layer w0.3: v1(23.75,27.5) 24,27.75 U1.8
  Bottom Layer w0.3: v1(23.75,27.5) 24,27.25 24,2.79 J5.3
PC2: J5.5 U1.10 U5.7 | length 56.5
  Top Layer w0.3: U5.7 20.75,15.75 26.75,9.75 v1(26.75,9.25) ; U1.10 25,28.793 26.543,27.25 32.25,27.25 v1(33.5,26)
  Bottom Layer w0.3: J5.5 26.73,2.6 26.73,4.773 26.75,4.793 v1(26.75,9.25) 26.75,9.5 27.25,10 28.311,10 28.75,9.561 28.75,7.75 29.25,7.25 30.5,7.25 34.25,11 34.25,25.25 v1(33.5,26)
PC6: J6.5 U1.37
PC8: J6.7 U1.39 | length 29.7
  Top Layer w0.3: J6.7 2.85,40.23 9.902,40.23 15.922,46.25 22.578,46.25 25,43.828 25,43.086 U1.39
PC9: J6.8 U1.40 | length 26.2
  Top Layer w0.3: J6.8 9.509,39.13 16.129,45.75 22.371,45.75 24.5,43.621 24.5,42.878 U1.40
PC10: J6.15 U1.51 | length 20.9
  Top Layer w0.3: J6.15 3.03,30.25 5.843,30.25 14.093,38.5 15.517,38.5 U1.51
PC11: J6.16 U1.52 | length 18.2
  Top Layer w0.3: J6.16 5.27,28.97 14.3,38 15.725,38 U1.52
PC12: J6.17 U1.53 | length 21.6
  Top Layer w0.3: J6.17 3.07,27.75 4.843,27.75 5,27.907 5,27.993 14.507,37.5 15.932,37.5 U1.53
RESET: C8.2 R11.2 S1.1 U1.7
SWCLK: P3.2 U1.49
SWDAT: C10.1 P3.4 U1.46 | length 2.8
  Bottom Layer w0.3: P3.4 54.88,26.67 C10.1
VMM: J1.7
pads on no net: LED7.2 P1.3 P1.5 P1.7 P1.11 P1.12 P1.16 P1.18 P1.19 P1.21 P1.22 P1.23 P1.24 P1.26 P1.27 P1.28 P1.32 P1.36 P1.38 P1.40 R16.1 S1.3 S1.4 S2.3 S2.4 S3.3 S3.4 S4.3 S4.4 U4.4 U5.20 U5.21 U5.22 USB1.6 USB1.7 USB1.8 USB1.9 USB1.MH1 USB1.MH2

## Polygon pours and split planes (outlines as drawn)
NetD4_1 on Bottom Layer "NETD4_1_L02_P000" (solid, remove dead copper, pour order 0): 54,16.25 56,16.25 58.25,14 58.25,11 61,11 61,14.5 57.75,17.75 54,17.75

## Keep-outs
Keep-Out Layer:
  circle w0.15: c61.5,3.5 r4
  circle w0.15: c61.5,52.5 r4
  circle w0.15: c3.5,52.5 r4
  circle w0.15: c3.5,3.5 r4

## Silkscreen, mask and mechanical layers (free items; w line width, h text height)
Mechanical 1:
  the board outline again, w0.15
Mechanical 16:
  drawing of 1874 lines, arcs and shapes, not listed
  text "1" at -29.286,135.509 h1.78
  text "2" at 43.358,135.509 h1.78
  text "3" at 116.51,135.509 h1.78
  text "4" at 189.408,135.509 h1.78
  text "A" at -63.627,112.497 h1.78
  text "A" at 223.393,112.497 h1.78
  text "B" at -63.627,64.44 h1.78
  text "B" at 223.393,64.44 h1.78
  text "C" at -63.627,15.926 h1.78
  text "C" at 225.755,-0.642 h1.78
  text "ENGINEER:" at 108.458,-21.082 h1.14
  text "TITLE:" at 146.558,-21.082 h1.14
  text "PCB DESIGNER:" at 108.458,-28.575 h1.14
  text "D" at -63.627,-32.08 h1.78
  text "D" at 223.393,-32.08 h1.78
  text "DATE:" at 108.458,-36.322 h1.14
  text "PART NO.:" at 146.558,-36.322 h1.14
  text "REV:" at 199.898,-36.322 h1.14
  text "Altium Limited" at 75.438,-38.862 h1.78
  text ".PRINT_DATE" at 109.728,-39.37 h1.78
  text "12a Rodborough Rd" at 75.438,-41.402 h1.78
  text "Frenchs Forest" at 75.438,-43.942 h1.78
  text "FILE NAME:" at 108.458,-43.942 h1.14
  text "DWG NO:" at 146.558,-43.942 h1.14
  text "SCALE:" at 199.898,-43.942 h1.14
  text "NSW 2086" at 75.438,-46.482 h1.78
  text ".PCB_FILE_NAME_NO_PATH" at 109.728,-46.99 h1.78
  text "1" at -29.286,-52.451 h1.78
  text "2" at 43.358,-52.451 h1.78
  text "3" at 116.51,-52.451 h1.78
  text "4" at 189.408,-52.451 h1.78
Drill Drawing:
  drawing of 295 lines, arcs and shapes, not listed
  text "Symbol" at -52.768,128.397 h1.83
  text "Count" at -39.919,128.397 h1.83
  text "Hole Size" at -24.937,128.397 h1.83
  text "Plated" at 4.264,128.397 h1.83
  text "Hole Type" at 17.113,128.397 h1.83
  text "Drill Layer Pair" at 35.752,128.397 h1.83
  text "Via/Pad" at 73.841,128.397 h1.83
  text "Pad Shape" at 88.823,128.397 h1.83
  text "Template" at 107.766,128.397 h1.83
  text "Description" at 125.033,128.397 h1.83
  text "Hole Tolerance (+)" at 146.719,128.397 h1.83
  text "Hole Tolerance (-)" at 180.593,128.397 h1.83
  text "1" at -39.919,124.587 h1.52
  text "0.600mm (23.62mil)" at -24.937,124.587 h1.52
  text "PTH" at 4.264,124.587 h1.52
  text "Round" at 17.113,124.587 h1.52
  text "Top Layer - Bottom Layer" at 35.752,124.587 h1.52
  text "Via" at 73.841,124.587 h1.52
  text "Rounded" at 88.823,124.587 h1.52
  text "v100h60" at 107.766,124.587 h1.52
  text "2" at -39.919,120.777 h1.52
  text "0.900mm (35.43mil)" at -24.937,120.777 h1.52
  text "NPTH" at 4.264,120.777 h1.52
  text "Round" at 17.113,120.777 h1.52
  text "Top Layer - Bottom Layer" at 35.752,120.777 h1.52
  text "Pad" at 73.841,120.777 h1.52
  text "Rounded" at 88.823,120.777 h1.52
  text "c60hn90" at 107.766,120.777 h1.52
  text "4" at -39.919,116.967 h1.52
  text "1.500mm (59.06mil)" at -24.937,116.967 h1.52
  text "PTH" at 4.264,116.967 h1.52
  text "Round" at 17.113,116.967 h1.52
  text "Top Layer - Bottom Layer" at 35.752,116.967 h1.52
  text "Pad" at 73.841,116.967 h1.52
  text "Rectangle" at 88.823,116.967 h1.52
  text "s300h150x0" at 107.766,116.967 h1.52
  text "4" at -39.919,113.157 h1.52
  text "2.750mm (108.27mil)" at -24.937,113.157 h1.52
  text "PTH" at 4.264,113.157 h1.52
  text "Round" at 17.113,113.157 h1.52
  text "Top Layer - Bottom Layer" at 35.752,113.157 h1.52
  text "Pad" at 73.841,113.157 h1.52
  text "Rounded" at 88.823,113.157 h1.52
  text "(Mixed)" at 107.766,113.157 h1.52
  text "31" at -39.919,109.347 h1.52
  text "0.400mm (15.75mil)" at -24.937,109.347 h1.52
  text "PTH" at 4.264,109.347 h1.52
  text "Round" at 17.113,109.347 h1.52
  text "Top Layer - Bottom Layer" at 35.752,109.347 h1.52
  text "Via" at 73.841,109.347 h1.52
  text "Rounded" at 88.823,109.347 h1.52
  text "v80h40" at 107.766,109.347 h1.52
  text "123" at -39.919,105.537 h1.52
  text "0.900mm (35.43mil)" at -24.937,105.537 h1.52
  text "PTH" at 4.264,105.537 h1.52
  text "Round" at 17.113,105.537 h1.52
  text "Top Layer - Bottom Layer" at 35.752,105.537 h1.52
  text "Pad" at 73.841,105.537 h1.52
  text "(Mixed)" at 88.823,105.537 h1.52
  text "(Mixed)" at 107.766,105.537 h1.52
  text "165 Total" at -39.919,101.727 h1.52
  text "Layer" at 100.618,100.903 h1.52
  text "Name" at 111.03,100.903 h1.52
  text "Material" at 134.646,100.903 h1.52
  text "Thickness" at 156.484,100.903 h1.52
  text "Constant" at 172.99,100.903 h1.52
  text "Board Layer Stack" at 187.464,100.903 h1.52
  text "1" at 100.618,97.855 h1.52
  text "Top Overlay" at 111.03,97.855 h1.52
  text "2" at 100.618,94.807 h1.52
  text "Top Solder" at 111.03,94.807 h1.52
  text "Solder Resist" at 134.646,94.807 h1.52
  text "0.010mm" at 156.484,94.807 h1.52
  text "3.5" at 172.99,94.807 h1.52
  text "3" at 100.618,91.759 h1.52
  text "Top Layer" at 111.03,91.759 h1.52
  text "Copper" at 134.646,91.759 h1.52
  text "0.036mm" at 156.484,91.759 h1.52
  text "4" at 100.618,88.711 h1.52
  text "Dielectric1" at 111.03,88.711 h1.52
  text "FR-4" at 134.646,88.711 h1.52
  text "0.320mm" at 156.484,88.711 h1.52
  text "4.8" at 172.99,88.711 h1.52
  text "5" at 100.618,85.663 h1.52
  text "Bottom Layer" at 111.03,85.663 h1.52
  text "Copper" at 134.646,85.663 h1.52
  text "0.036mm" at 156.484,85.663 h1.52
  text "6" at 100.618,82.615 h1.52
  text "Bottom Solder" at 111.03,82.615 h1.52
  text "Solder Resist" at 134.646,82.615 h1.52
  text "0.010mm" at 156.484,82.615 h1.52
  text "3.5" at 172.99,82.615 h1.52
  text "7" at 100.618,79.567 h1.52
  text "Bottom Overlay" at 111.03,79.567 h1.52

## Dimensions
0,56 to 0,0 on Mechanical 5
0,56 to 65,56 on Mechanical 5

## Text inside footprints (layer, text, board x,y; h text height)
J3: Top Overlay "8" at 42.282,38.106 h1.27 r270; Top Overlay "7" at 39.742,38.106 h1.27 r270; Top Overlay "1" at 39.742,49.282 h1.27 r270; Top Overlay "2" at 42.282,49.79 h1.27 r270
J5: Top Overlay "2" at 20.21,3.532 h1.27; Top Overlay "1" at 20.21,0.992 h1.27; Top Overlay "25" at 54.754,0.992 h1.27; Top Overlay "26" at 54.754,3.532 h1.27
J6: Top Overlay "2" at 3.782,49.29 h1.27 r270; Top Overlay "1" at 1.242,49.29 h1.27 r270; Top Overlay "25" at 1.242,14.746 h1.27 r270; Top Overlay "26" at 3.782,14.746 h1.27 r270
P1: Top Overlay "39" at 58.662,50.722 h1.27; Top Overlay "40" at 58.662,53.262 h1.27; Top Overlay "2" at 5.83,53.262 h1.27; Top Overlay "1" at 5.83,50.722 h1.27
USB1: Mechanical 1 "PCB Edge" at 65.432,15.964 h0.25 r90